# Altium PCB CarettaCellModule.PcbDoc
Units mm, origin at the board's own origin, x right, y up, seen from the top; angles counter-clockwise.
Board outline 18 x 65 mm, 2 copper layers (Top Layer, Bottom Layer); 21 components, 14 nets, 54 pads, 7 vias.
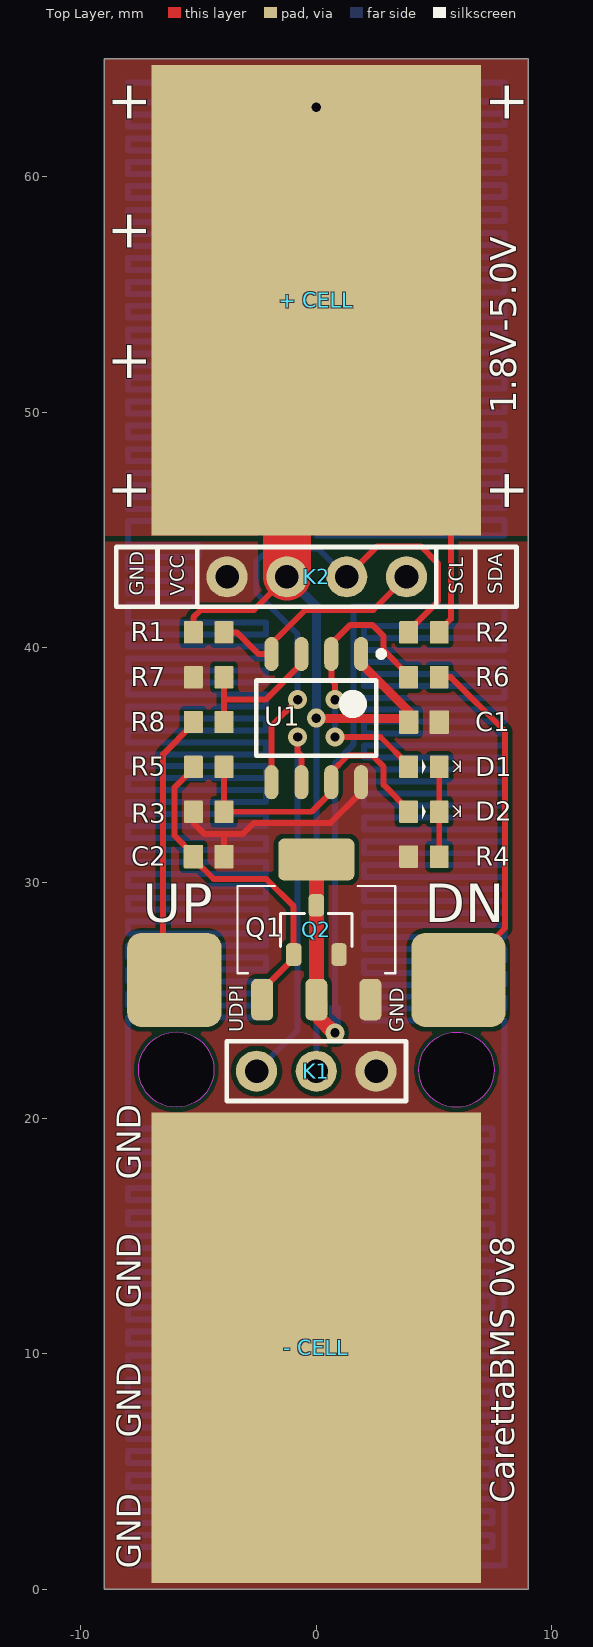
[diagram p0: Top Layer view]
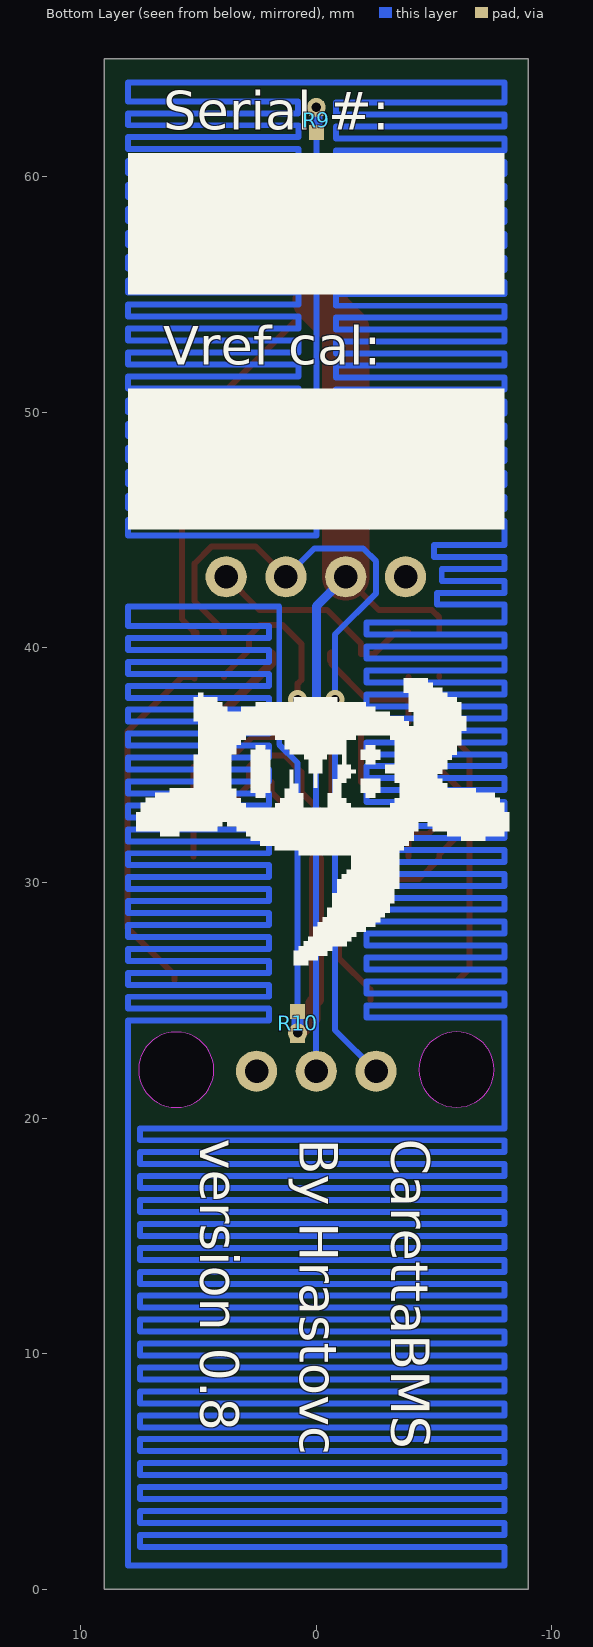
[diagram p1: Bottom Layer view, seen from below]

## Layer stack, top to bottom
Top Solder: solder mask 0.0102, Solder Resist, Dk 3.5
Top Layer: signal copper 0.0356
Dielectric 1: dielectric 0.32, FR-4, Dk 4.8
Bottom Layer: signal copper 0.0356
Bottom Solder: solder mask 0.0102, Solder Resist, Dk 3.5

## Board outline
-9,0 -9,65 9,65 9,0
cut-out: 5.953,20.46 cw(c5.953,22.06) 4.353,22.06 cw(c5.953,22.06) 5.953,23.66 cw(c5.953,22.06) 7.553,22.06 cw(c5.953,22.06)
cut-out: -5.953,20.466 cw(c-5.953,22.066) -7.553,22.066 cw(c-5.953,22.066) -5.953,23.666 cw(c-5.953,22.066) -4.353,22.066 cw(c-5.953,22.066)
cut-out: -5.556,23.654

## Design rules (kind name [scope] priority, off if disabled: settings)
BoardOutlineClearance [InNet('R')] p1: gap=0.8 ignorepadtopadclearanceinfootprint=FALSE
Clearance Clearance_1 [InNet('R')] p1: gap=0.254 ignorepadtopadclearanceinfootprint=FALSE
Clearance [All] p2: gap=0.203 ignorepadtopadclearanceinfootprint=FALSE
ComponentClearance ComponentClearance_1 [InComponent('Q1') vs InComponent('Q2')] p1: gap=0 collisioncheckmode=3 verticalgap=0 showdistances=FALSE
ComponentClearance [All] p2: gap=0.254 collisioncheckmode=3 verticalgap=0.254 showdistances=FALSE
HoleSize [All] p1: absolutevalues=TRUE maxlimit=3.2 minlimit=0.025 maxpercent=80.000 minpercent=20.000
PolygonConnect [All] p1: connectstyle=Direct reliefconductorwidth=0.254 reliefentries=4 polygonreliefangle="90 Angle" airgapwidth=0.254
RoutingVias [All] p1: holewidth=0.4 width=0.8 viastyle="Through Hole" minholewidth=0.4 minwidth=0.8 maxholewidth=0.6 maxwidth=1.2
SilkToSilkClearance [All] p1: silktosilkclearance=0.127
SolderMaskExpansion [All] p1: expansion=0.102
Width [All] p1: maxlimit=2.54 minlimit=0.203 preferedwidth=0.254
27 further rules are at their usual default settings.

## Components (designator, comment, footprint, x,y, rotation, side; value= is the part's Value field where it differs from the comment)
"+ CELL" "PAD" PAD 0,54.75 r0 top locked
"- CELL" "PAD" PAD 0,10.25 r0 top locked
C1 "100n" C1608_0603I_N 4.572,36.83 r0 top
C2 "100n" C1608_0603I_N -4.572,31.115 r0 top
D1 "LED" LED1608_0603I_N 4.572,34.925 r180 top
D2 "LED" LED1608_0603I_N 4.572,33.02 r180 top
K1 "H1x3" H1x3 -2.54,22 r180 top locked
K2 "H1x4" H1x4 -3.79,43 r180 top locked
Q1 "TF2302" SOT23-3_N 0,28 r0 top locked value={Value}
Q2 "IRLML2502" SOT223_L 0,28.016 r0 top value={Value}
R1 "4k7" R1608_0603I_N -4.572,40.64 r0 top
R2 "4k7" R1608_0603I_N 4.572,40.64 r180 top
R3 "10k" R1608_0603I_N -4.572,33.02 r180 top
R4 "1k" R1608_0603I_N 4.572,31.115 r180 top
R5 "10k" R1608_0603I_N -4.572,34.925 r180 top
R6 "120k" R1608_0603I_N 4.572,38.735 r0 top
R7 "1M" R1608_0603I_N -4.572,38.735 r180 top
R8 "120k" R1608_0603I_N -4.572,36.83 r180 top
R9 "TraceResistor" NetTie 0,62.389 r270 bottom net-tie
R10 "TraceResistor" NetTie 0.794,24.032 r270 bottom net-tie
U1 "ATtiny402" ATtiny402-SSFR 0,37 r270 top locked

## Footprints (in the part's own frame and the unit in brackets; to place one, negate y for a bottom-side part, rotate by r counter-clockwise, add the part's x,y. Pads: shape width x height; smd on the part's side, far side on the other; paste and mask are expansions set on the pad)
ATtiny402-SSFR [mm] "SOIC150 (SWB)"
  oval 1.45x0.6 smd: 1(-2.725,1.905) 2(-2.725,0.635) 3(-2.725,-0.635) 4(-2.725,-1.905) 5(2.725,-1.905) 6(2.725,-0.635) 7(2.725,0.635) 8(2.725,1.905)
  silkscreen extent -2.85,-2.55 1.6,2.88, body extent -3,-2.55 3,2.55, height 1.75
C1608_0603I_N [mm] "Chip Capacitor, 2-Leads, Body 1.57x0.85mm, IPC Medium Density"
  rrect10% 0.82x1 smd: 1(-0.65,0) 2(0.65,0)
  body extent -0.82,-0.48 0.82,0.48, height 0.95
H1x3 [mm]
  round 1.75 hole 1 paste-254: 1(0,0) 2(-2.54,0) 3(-5.08,0)
  silkscreen extent -6.35,-1.27 1.27,1.27, body extent -6.35,-1.27 1.27,1.27, height 8.4
H1x4 [mm]
  round 1.75 hole 1 paste-254: 1(0,0) 2(-2.54,0) 3(-5.08,0) 4(-7.62,0)
  silkscreen extent -8.89,-1.27 1.27,1.27, body extent -8.89,-1.27 1.27,1.27, height 8.4
LED1608_0603I_N [mm] "SMD LED, 2-Leads, Body 1.57x0.85mm, IPC Medium Density"
  rrect10% 0.8x0.95 smd: 1(-0.65,0) 2(0.65,0)
  silkscreen extent -0.08,-0.3 0.08,0.3, body extent -0.8,-0.4 0.8,0.4, height 0.7
NetTie [mil]
  rect 25x25 smd paste-39370.1: 1(-20,0) 2(20,0)
  Top Layer region: -30,10 30,10 30,-10 -30,-10
PAD [mm]
  rect 14x20 smd paste-254: 1(0,0)
R1608_0603I_N [mm] "Chip Resistor, 2-Leads, Body 1.57x0.85mm, IPC Medium Density"
  rrect10% 0.8x0.95 smd: 1(-0.65,0) 2(0.65,0)
  body extent -0.82,-0.48 0.82,0.48, height 0.5
SOT23-3_N [mm] "Small Outline Transistor (SOT23), 0.96 mm pitch; 3 pin, 2.92 mm L X 1.30 mm W X 1.12 mm H body"
  rrect49% 0.65x0.96 smd: 1(-0.96,-1.045) 2(0.96,-1.045) 3(0,1.045)
  silkscreen extent -1.52,-0.7 1.52,0.7, body extent -1.46,-1.18 1.46,1.18, height 1.12
SOT223_L [mm] "Small Outline Transistor (SOT223), 2.30 mm pitch; 4 pin, 6.50 mm L X 3.50 mm W X 1.80 mm H body"
  rrect49% 0.93x1.77 smd: 1(-2.3,-2.975) 2(0,-2.975) 3(2.3,-2.975)
  rrect26% 3.23x1.77 smd: 4(0,2.975)
  silkscreen extent -3.35,-1.85 3.35,1.85, body extent -3.25,-3.5 3.25,3.5, height 1.8

## Part data
C1 C2: library part C, "Capacitor"
K1: "Header 1x3 (male)"
K2: "Header 1x4 (male)"
Q1: library part 2N7002, "N-ch, Vdss=60V, Id=115mA, Rdson=2R"
Q2: library part BSP603S2L, "BSP603S2L"
R1 R2 R3 R4 R5 R6 R7 R8: library part R, "R"

## Free pads (board coordinates)
  rrect30% 4x4 smd paste-254: 5(-6.032,25.876) 6(6.032,25.876)

## Via types
v1: diameter 0.8, hole 0.4, Top Layer to Bottom Layer, tented both sides, 7 vias

## Nets (pads, with @x,y where several pads share a name; then routed paths per layer and width w, separated by ;. In a path a pad name is that pad's centre, name@x,y a point inside that pad or via, vN(x,y) a via of type N, cw(c..) or ccw(c..) an arc to the next point about the centre after c; other vN are vias at no path point)
DN: pad.6 R6.2 | length 15.2
  Top Layer w0.254: R6.2@5.174,38.682 R6.2@5.174,38.757 ; R6.2 5.715,38.735 8.017,36.433 8.017,28.079 6.032,26.095 pad.6
Drain: Q1.3 Q2.2 Q2.4 R10.2 | length 7.7
  Top Layer w0.635: Q2.4 Q1.3 Q2.2 0.148,24.894 0.148,24.227 0.749,23.626 v1(0.794,23.626)
GATE: C2.1 Q1.1 Q2.1 R5.2 | length 14.2
  Top Layer w0.254: R5.2@-5.271,35.004 R5.2@-5.254,34.987 ; R5.2 -5.222,34.85 -6.032,34.04 -6.032,32.015 -5.222,31.205 C2.1 -5.222,31.025 -4.36,30.162 -2.123,30.162 -0.96,28.999 Q1.1 -0.96,26.801 -2.3,25.461 Q2.1 Q2.1@-2.3,25.025
  Top Layer w0.381: R5.2@-5.271,35.004 R5.2@-5.254,35.02
GND: "- CELL.1" C1.2 C2.2 K1.3 K2.1 Q1.2 Q2.3 R3.2 R4.2 R7.2 U1.8 | length 10.1
  Top Layer w0.254: R3.2@-5.254,32.945 R3.2@-5.254,33.02 ; R3.2 -5.222,32.544 -4.746,32.067 -3.922,32.067 ; R7.2 R7.2@-5.222,38.81 ; C2.2 -3.922,32.067 ; U1.8 1.905,33.85 0.599,32.544 -2.658,32.544 -3.134,32.067 -3.922,32.067
NetD1_1: D1.1 D2.1 R4.1 | length 3.8
  Top Layer w0.254: R4.1 5.222,32.925 5.254,32.957 D2.1@5.254,33.032 ; D2.1 D1.1
PWM: D2.2 R3.1 R5.1 U1.7 | length 12.7
  Top Layer w0.254: R5.1 R3.1 -0.195,33.02 0.635,33.85 U1.7 0.635,34.7 1.347,35.412 2.37,35.412 2.857,34.925 2.857,34.159 3.948,33.069 3.948,33.026 D2.2@3.954,33.032
R: R9.2 R10.1 | length 1700
  Bottom Layer w0.254: -8,20.59 -8,20.082 -8,19.574 7.492,19.574 7.492,19.066 -8,19.066 -8,18.558 7.492,18.558 7.492,18.05 -8,18.05 -8,17.542 7.492,17.542 7.492,17.034 -8,17.034 -8,16.526 7.492,16.526 7.492,16.018 -8,16.018 -8,15.51 7.492,15.51 7.492,15.002 -8,15.002 -8,14.494 7.492,14.494 7.492,13.986 -8,13.986 -8,13.478 7.492,13.478 7.492,12.97 -8,12.97 -8,12.462 7.492,12.462 7.492,11.954 -8,11.954 -8,11.446 7.492,11.446 7.492,10.938 -8,10.938 -8,10.43 7.492,10.43 7.492,9.922 -8,9.922 -8,9.414 7.492,9.414 7.492,8.906 -8,8.906 -8,8.398 7.492,8.398 7.492,7.89 -8,7.89 -8,7.382 7.492,7.382 7.492,6.874 -8,6.874 -8,6.366 7.492,6.366 7.492,5.858 -8,5.858 -8,5.35 7.492,5.35 7.492,4.842 -8,4.842 -8,4.334 7.492,4.334 7.492,3.826 -8,3.826 -8,3.318 7.492,3.318 7.492,2.81 -8,2.81 -8,2.302 7.492,2.302 7.492,1.794 -8,1.794 -8,1.286 -8,1.032 -8,1 8,1 8,23.892 8,24.146 2.018,24.146 2.018,24.654 8,24.654 8,25.162 2.018,25.162 2.018,25.67 8,25.67 8,26.178 2.018,26.178 2.018,26.686 8,26.686 8,27.194 2.018,27.194 2.018,27.702 8,27.702 8,28.21 2.018,28.21 2.018,28.718 8,28.718 8,29.226 2.018,29.226 2.018,29.734 8,29.734 8,30.242 2.018,30.242 2.018,30.75 8,30.75 8,31.258 2.018,31.258 2.018,31.766 8,31.766 8,32.274 2.018,32.274 2.018,32.782 8,32.782 8,33.29 2.018,33.29 2.018,33.798 8,33.798 8,34.306 2.018,34.306 2.018,34.814 8,34.814 8,35.322 2.018,35.322 2.018,35.83 8,35.83 8,36.338 2.018,36.338 2.018,36.846 8,36.846 8,37.354 2.018,37.354 2.018,37.862 8,37.862 8,38.37 2.018,38.37 2.018,38.878 8,38.878 8,39.386 2.018,39.386 2.018,39.894 8,39.894 8,40.402 2.018,40.402 2.018,40.91 8,40.91 8,41.418 8,41.744 1.575,41.744 1.575,35.871 0.794,35.09 R10.1 ; -8,20.59 -8,23.524 -8,23.778 -8,24.286 -2.136,24.286 -2.136,24.794 -8,24.794 -8,25.302 -2.136,25.302 -2.136,25.81 -8,25.81 -8,26.318 -2.136,26.318 -2.136,26.826 -8,26.826 -8,27.334 -2.136,27.334 -2.136,27.842 -8,27.842 -8,28.35 -2.136,28.35 -2.136,28.858 -8,28.858 -8,29.366 -2.136,29.366 -2.136,29.874 -8,29.874 -8,30.382 -2.136,30.382 -2.136,30.89 -8,30.89 -8,31.398 -2.136,31.398 -2.136,31.906 -8,31.906 -8,32.414 -2.136,32.414 -2.136,32.922 -8,32.922 -8,33.43 -2.136,33.43 -2.136,33.938 -8,33.938 -8,34.446 -2.136,34.446 -2.136,34.954 -8,34.954 -8,35.462 -2.136,35.462 -2.136,35.97 -8,35.97 -8,36.478 -2.136,36.478 -2.136,36.986 -8,36.986 -8,37.494 -2.136,37.494 -2.136,38.002 -8,38.002 -8,38.51 -2.136,38.51 -2.136,39.018 -8,39.018 -8,39.526 -2.136,39.526 -2.136,40.034 -8,40.034 -8,40.542 -2.136,40.542 -2.136,41.05 -8,41.05 -8,41.558 -8,41.593 -8,41.815 -5.129,41.815 -5.129,42.323 -8,42.323 -8,42.831 -5.328,42.831 -5.328,43.339 -8,43.339 -8,43.847 -4.999,43.847 -4.999,44.355 -8,44.355 -8,44.609 -8,44.863 -8,45.371 -0.834,45.371 -0.834,45.879 -8,45.879 -8,46.387 -0.834,46.387 -0.834,46.895 -8,46.895 -8,47.403 -0.834,47.403 -0.834,47.911 -8,47.911 -8,48.419 -0.834,48.419 -0.834,48.927 -8,48.927 -8,49.435 -0.834,49.435 -0.834,49.943 -8,49.943 -8,50.451 -0.834,50.451 -0.834,50.959 -8,50.959 -8,51.467 -0.834,51.467 -0.834,51.975 -8,51.975 -8,52.483 -0.834,52.483 -0.834,52.991 -8,52.991 -8,53.499 -0.834,53.499 -0.834,54.007 -8,54.007 -8,54.515 -0.834,54.515 -0.834,55.023 -8,55.023 -8,55.531 -0.834,55.531 -0.834,56.039 -8,56.039 -8,56.547 -0.834,56.547 -0.834,57.055 -8,57.055 -8,57.563 -0.834,57.563 -0.834,58.071 -8,58.071 -8,58.579 -0.834,58.579 -0.834,59.087 -8,59.087 -8,59.595 -0.834,59.595 -0.834,60.103 -8,60.103 -8,60.611 -0.834,60.611 -0.834,61.119 -8,61.119 -8,61.627 -0.834,61.627 -0.834,62.135 -8,62.135 -8,62.643 -0.834,62.643 -0.834,63.151 -8,63.151 -8,63.659 -8,63.706 -8,64 0.254,64 8,64 8,63.706 8,63.198 0.781,63.198 0.781,62.69 8,62.69 8,62.182 0.766,62.182 0.766,61.674 8,61.674 8,61.166 0.766,61.166 0.766,60.658 8,60.658 8,60.15 0.766,60.15 0.766,59.642 8,59.642 8,59.134 0.766,59.134 0.766,58.626 8,58.626 8,58.118 0.766,58.118 0.766,57.61 8,57.61 8,57.102 0.766,57.102 0.766,56.594 8,56.594 8,56.086 0.766,56.086 0.766,55.578 8,55.578 8,55.07 0.766,55.07 0.766,54.562 8,54.562 8,54.054 0.766,54.054 0.766,53.546 8,53.546 8,53.038 0.766,53.038 0.766,52.53 8,52.53 8,52.022 0.766,52.022 0.766,51.514 8,51.514 8,51.006 0.766,51.006 0.766,50.498 8,50.498 8,49.99 0.766,49.99 0.766,49.482 8,49.482 8,48.974 0.766,48.974 0.766,48.466 8,48.466 8,47.958 0.766,47.958 0.766,47.45 8,47.45 8,46.942 0.766,46.942 0.766,46.434 8,46.434 8,45.926 0.766,45.926 0.766,45.418 8,45.418 8,45.164 8,44.75 0,44.75 R9.2
RxD: R7.1 R8.1 U1.3 | length 6.2
  Top Layer w0.254: R8.1 -3.922,37.782 ; R7.1 -3.922,37.782 ; U1.3@-0.635,39.471 -0.635,39.3 -2.153,37.782 -3.922,37.782
  Top Layer w0.381: U1.3@-0.635,39.471 U1.3
SCL: K2.3 R2.2 U1.5 | length 23.3
  Top Layer w0.254: U1.5 -1.905,36.671 v1(-0.794,37.782) ; K2.3 2.581,44.291 4.445,44.291 5.174,43.562 5.174,41.967 3.922,40.715 R2.2
  Bottom Layer w0.254: v1(-0.794,37.782) -0.794,40.553 -2.54,42.299 -2.54,43.656 -1.991,44.205 -1.749,44.205 -1.294,44.205 0.085,44.205 K2.3
SDA: K2.4 R1.2 U1.4 | length 9.7
  Top Layer w0.254: R1.2 -3.378,40.64 -2.463,39.725 U1.4 -1.905,40.15 -0.463,41.593 2.422,41.593 K2.4
TxD: D1.2 R6.1 U1.2 | length 12.7
  Top Layer w0.254: v1(0.794,36.195) 2.727,36.195 3.922,35 D1.2 ; v1(0.794,37.782) 0.794,38.46 0.635,38.619 U1.2 0.635,40.15 1.442,40.957 2.381,40.957 2.857,40.481 2.857,39.874 3.922,38.81 R6.1
  Bottom Layer w0.254: v1(0.794,36.195) v1(0.794,37.782)
UDPI: K1.1 U1.6 | length 17.3
  Top Layer w0.254: v1(-0.794,36.195) -0.794,35.571 -0.635,35.412 U1.6 U1.6@-0.635,33.85
  Bottom Layer w0.254: K1.1 -0.794,23.746 v1(-0.794,36.195)
UP: pad.5 R8.2 | length 11.7
  Top Layer w0.254: pad.5 -6.509,26.352 -6.509,35.468 -5.222,36.755 R8.2 ; R8.2@-5.318,37.055 R8.2@-5.285,37.022
VCC: "+ CELL.1" C1.1 K1.2 K2.2 R1.1 R2.1 R9.1 U1.1 | length 64
  Top Layer w0.254: R1.1 -5.222,41.275 -4.904,41.593 -2.658,41.593 K2.2 ; 0,54.75 5.715,49.035 5.715,41.208 5.222,40.715 R2.1 ; R2.1@5.095,40.565 R2.1@5.095,40.64
  Top Layer w0.381: v1(0,37) 0.011,36.989 3.763,36.989 C1.1 3.954,36.798 3.954,37.262 1.905,39.311 U1.1
  Top Layer w2.032: K2.2 -1.25,53.5 0,54.75
  Bottom Layer w0.254: K1.2 0.004,22.004 0.004,37.382 v1@0.008,37.386
  Bottom Layer w0.381: K2.2@-1.25,42.632 K2.2 0,41.75 v1@0,37.386
  other v1: 0,62.944

## Polygon pours and split planes (outlines as drawn)
GND on Top Layer "Top Layer-GND" (solid, remove dead copper, pour order 8): -9,44.5 9,44.5 9,0 -9,0
VCC on Top Layer "Top Layer-VCC" (solid, pour order 16): -9,65 -9,44.75 9,44.75 9,65

## Silkscreen, mask and mechanical layers (free items; w line width, h text height)
Top Overlay:
  lines w0.203: -6.75,41.75 -6.75,44.25 ; -5.06,41.73 -8.5,41.73 -8.5,44.27 -5.06,44.27 ; 5.1,41.73 8.5,41.73 8.5,44.27 5.1,44.27 ; 6.75,41.73 6.75,44.27
  text "+" at -7.223,62.23 h1.63 r90
  text "+" at 8.811,62.23 h1.63 r90
  text "+" at -7.223,56.753 h1.63 r90
  text "+" at -7.223,51.197 h1.63 r90
  text "1.8V-5.0V" at 8.493,49.927 h1.12 r90
  text "+" at -7.223,45.72 h1.63 r90
  text "+" at 8.811,45.72 h1.63 r90
  text "SCL" at 6.25,42.25 h0.61 r90
  text "SDA" at 7.905,42.25 h0.61 r90
  text "GND" at -7.325,42.2 h0.61 r90
  text "VCC" at -5.6,42.2 h0.61 r90
  text "UP" at -7.382,28.337 h1.63
  text "DN" at 4.604,28.337 h1.63
  text "UDPI" at -3.096,23.654 h0.61 r90
  text "GND" at 3.708,23.654 h0.61 r90
  text "GND" at -7.461,17.383 h1.02 r90
  text "GND" at -7.461,11.906 h1.02 r90
  text "GND" at -7.461,6.429 h1.02 r90
  text "CarettaBMS 0v8" at 8.414,3.651 h1.02 r90
  text "GND" at -7.461,0.873 h1.02 r90
Bottom Overlay:
  drawing of 6 lines, arcs and shapes, not listed
  text "Serial #:" at 6.5,62 h1.63
  text "Vref cal:" at 6.5,52 h1.63
  text "CarettaBMS" at -3.175,19.129 h1.63 r90
  text "By Hrastovc" at 0.714,19.129 h1.63 r90
  text "version 0.8" at 4.921,19.129 h1.63 r90
BoardOutline:
  circle w0.127: c-5.953,22.066 r1.6
  circle w0.127: c5.953,22.06 r1.6
  lines w0.127: -9,0 9,0 9,65 -9,65 -9,0

## Text inside footprints (layer, text, board x,y; h text height)
D1: Top Overlay "K" at 6.223,35.179 h0.5 r180
D2: Top Overlay "K" at 6.223,33.274 h0.5 r180